# EAGLE board Quad VCA (no pots) PANEL v1 (EAGLE 7.7.0)
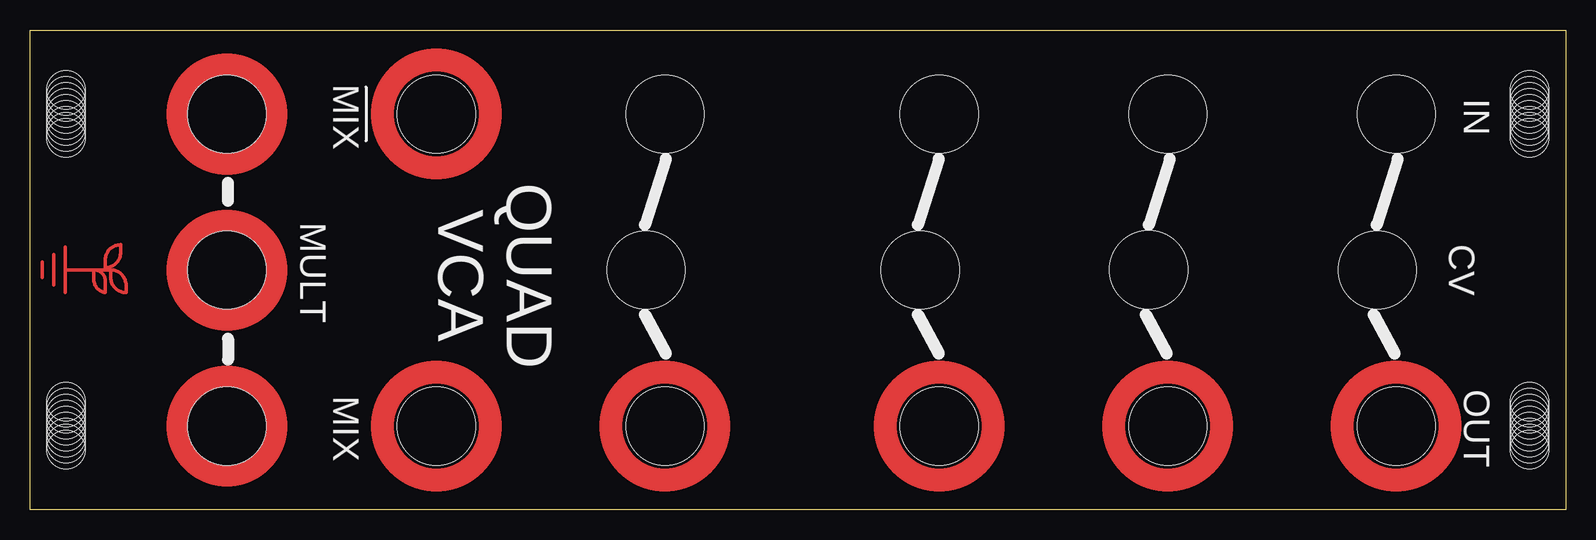
[diagram p0: board, top side]
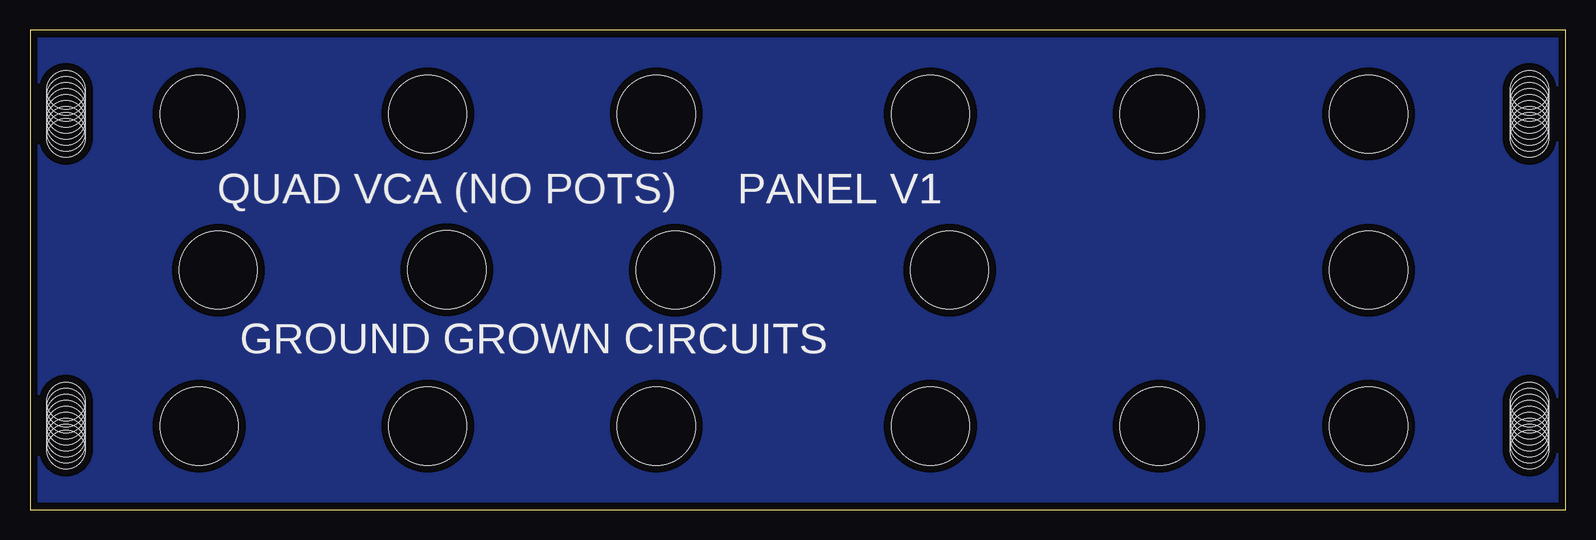
[diagram p1: board, bottom side, seen from below]

Size 128 x 40 mm. Coordinates in mm from the lower left corner, seen from the top.
Outline: 0,0 0,40 128,40 128,0 0,0
Copper layers (1*16): Top 0.035mm / dielectric 1.5mm / Bottom 0.035mm
Design rules "SparkFun": minimum track width 8mil, minimum drill 20mil, track to track 8mil, track to pad 8mil, pad to pad 8mil, via to via 8mil, smd to smd 8mil, copper to edge 8mil, drill to drill 8mil, minimum pad ring 12mil, minimum via ring 10mil, stop-mask expansion 4mil, vias tented up to drill 20mil, thermal gap 10mil

## Footprints (pad centres in the part's own frame; a part is rotated, then mirrored left to right if it is on the bottom)
JACK_DRILL = hole 6.5: 0,0
MOUNT_DRILL = hole 3.2: 3,9; 3,8.5; 3,8; 3,7.5; 3,7; 3,6.5; 3,6; 3,5.5; 3,5
JACK_DRILL_COPPER = hole 6.5: 0,0
JACK_DRILL_COPPER_SM = hole 6.5: 0,0

## Placement (x,y rotation side)
CV.1  [JACK_DRILL]  112.31,19.97 270 top
CV.3  [JACK_DRILL]  74.2,19.97 270 top
CV.4  [JACK_DRILL]  51.34,19.97 270 top
E$1  [MOUNT_DRILL]  0,0 0 top
E$2  [MOUNT_DRILL]  128,40 180 top
E$3  [MOUNT_DRILL]  0,40 180 bottom
E$4  [MOUNT_DRILL]  128,0 0 bottom
E$5  [JACK_DRILL]  93.25,20 0 top
E$6  [LOGO_SMALL_COPPER]  3,20 270 top
IN1  [JACK_DRILL]  113.89,32.98 0 top
IN2  [JACK_DRILL]  94.84,32.98 0 top
IN3  [JACK_DRILL]  75.79,32.98 0 top
IN4  [JACK_DRILL]  52.93,32.98 0 top
INV.MIX  [JACK_DRILL_COPPER]  33.88,32.98 0 top
M1  [JACK_DRILL_COPPER_SM]  16.42,32.98 90 top
M2  [JACK_DRILL_COPPER_SM]  16.42,6.95 90 top
M3  [JACK_DRILL_COPPER_SM]  16.42,19.97 90 top
MIX  [JACK_DRILL_COPPER]  33.88,6.95 180 top
OUT1  [JACK_DRILL_COPPER]  113.89,6.95 180 top
OUT2  [JACK_DRILL_COPPER]  94.84,6.95 180 top
OUT3  [JACK_DRILL_COPPER]  75.79,6.95 180 top
OUT4  [JACK_DRILL_COPPER]  52.93,6.95 180 top

## Library data of the parts
CV.1 CV.3 CV.4 E$1-E$6 IN1-IN4 INV.MIX M1-M3 MIX OUT1-OUT4 = GroundGrownCircuits

## Tracks (layer width: path | path; a pad name or v marks a point on that pad's centre or on a via)
S$1
  pour Bottom (isolate 0.61): 0,0 128,0 128,40 0,40

## Text on the board
tPlace: MIX | IN | MULT | QUAD / VCA | CV | MIX | OUT
bPlace: PANEL V1 | QUAD VCA (NO POTS) | GROUND GROWN CIRCUITS